# EAGLE board stripPCB (EAGLE 6.2)
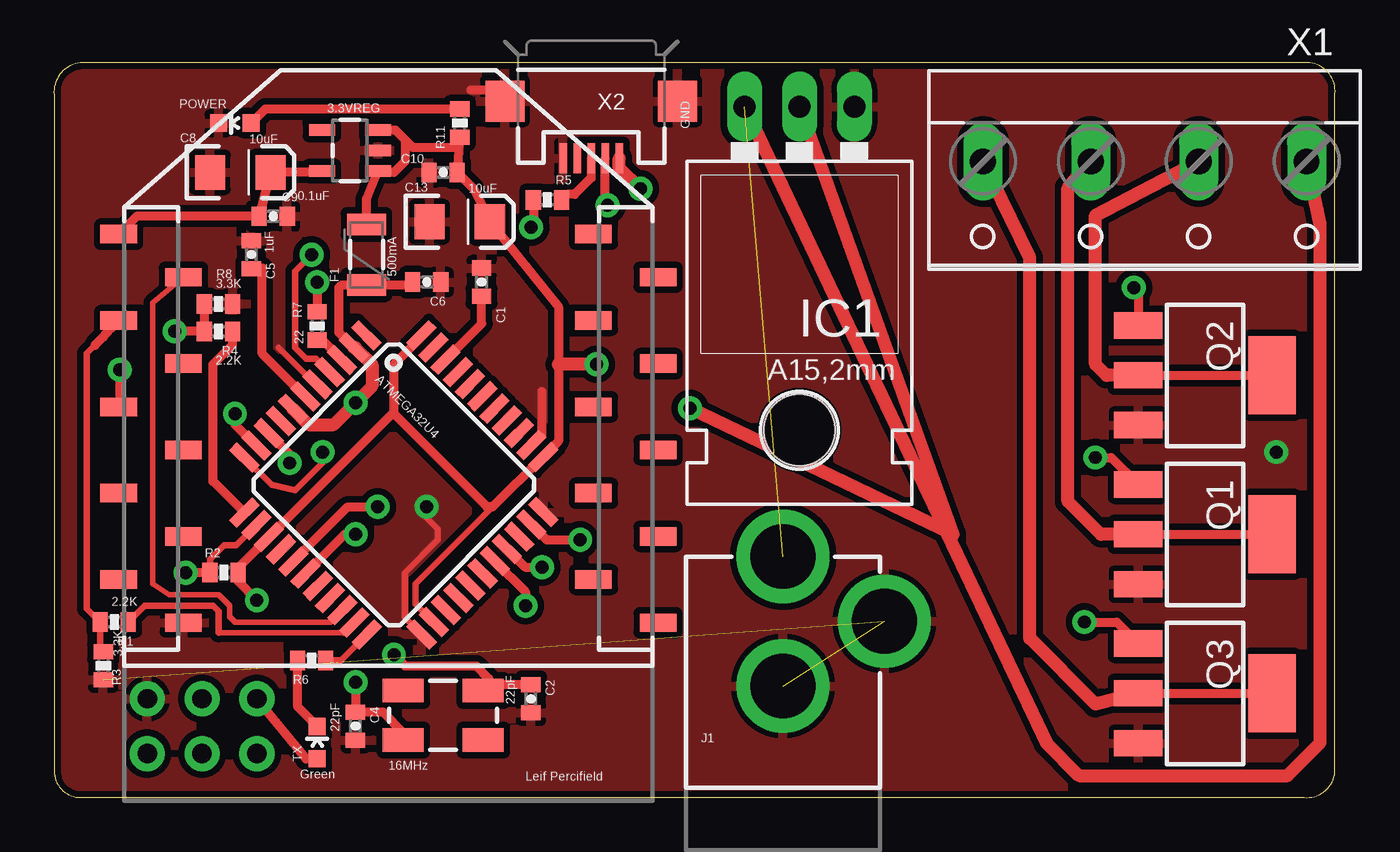
[diagram p0: board, top side]
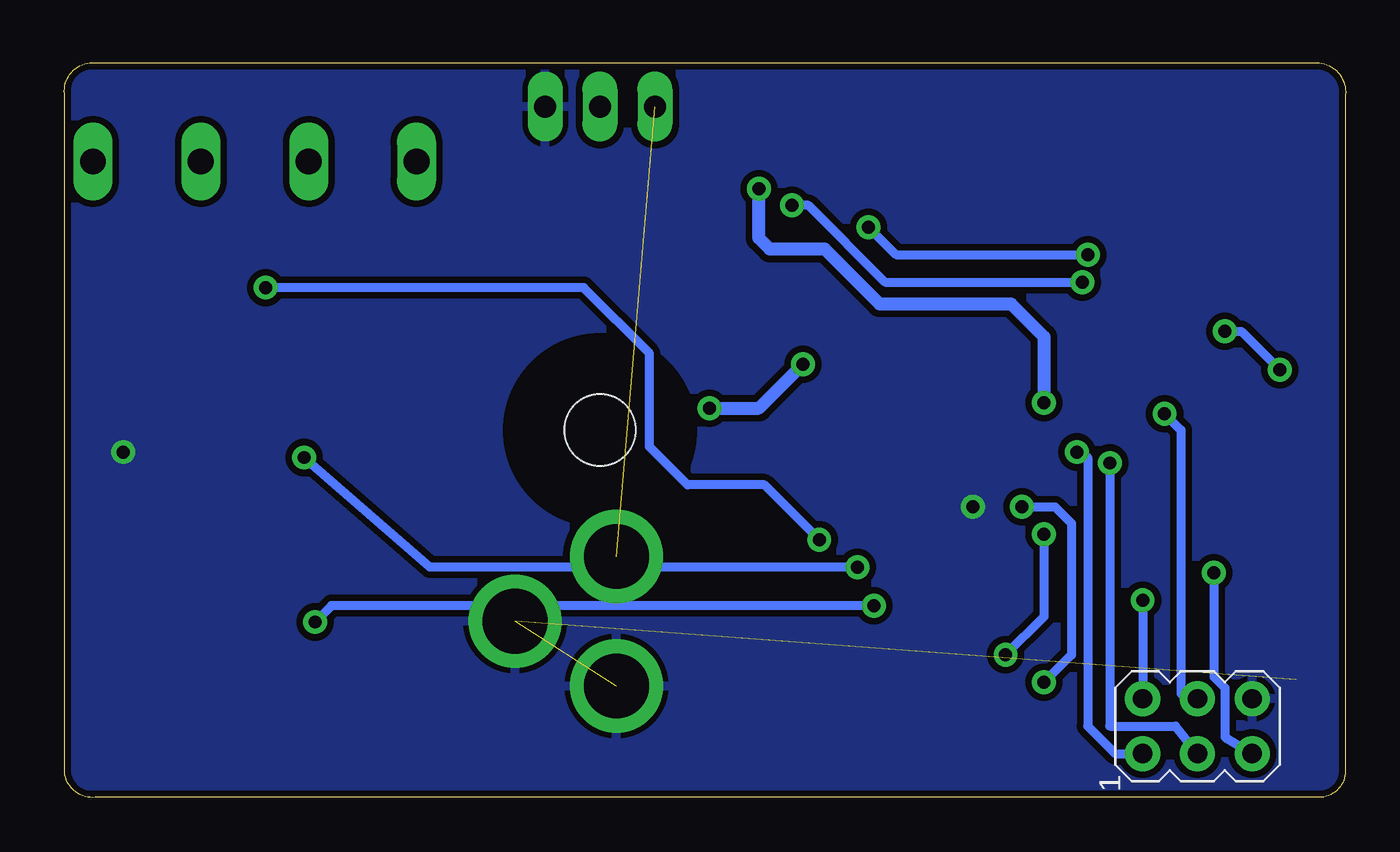
[diagram p1: board, bottom side, seen from below]

Size 59.37 x 34.03 mm. Coordinates in mm from the lower left corner, seen from the top.
Outline: 0.01,1.23 arc90 1.23,0.01 57.94,0.01 arc90 59.37,1.18 59.37,32.61 arc90 58.2,34.03 1.22,34.03 arc90 0.01,32.56 0.01,1.23
Copper layers (1*16): Top 0.035mm / dielectric 1.5mm / Bottom 0.035mm
Design rules: minimum track width 8mil, minimum drill 20mil, track to track 8mil, track to pad 8mil, pad to pad 8mil, via to via 8mil, smd to smd 8mil, copper to edge 10mil, drill to drill 8mil, minimum pad ring 12mil, minimum via ring 10mil, stop-mask expansion 4mil, vias tented up to drill 25mil, thermal gap 10mil
Net classes: 0 default: width 0.003 mm, drill 0.254 mm, clearance 0.152 mm

## Footprints (pad centres in the part's own frame; a part is rotated, then mirrored left to right if it is on the bottom)
SOT23-5 = smd 0.55 x 1.2: 1 -0.95,-1.3; 2 0,-1.3; 3 0.95,-1.3; 4 0.95,1.3; 5 -0.95,1.3
SPARKFUN-DIGITALIC_TQFP44 = smd 1.5 x 0.5: 1 -5.8,4; 2 -5.8,3.2; 3 -5.8,2.4; 4 -5.8,1.6; 5 -5.8,0.8; 6 -5.8,0; 7 -5.8,-0.8; 8 -5.8,-1.6; 9 -5.8,-2.4; 10 -5.8,-3.2; 11 -5.8,-4; 23 5.8,-4; 24 5.8,-3.2; 25 5.8,-2.4; 26 5.8,-1.6; 27 5.8,-0.8; 28 5.8,0; 29 5.8,0.8; 30 5.8,1.6; 31 5.8,2.4; 32 5.8,3.2; 33 5.8,4 | smd 0.5 x 1.5: 12 -4,-5.8; 13 -3.2,-5.8; 14 -2.4,-5.8; 15 -1.6,-5.8; 16 -0.8,-5.8; 17 0,-5.8; 18 0.8,-5.8; 19 1.6,-5.8; 20 2.4,-5.8; 21 3.2,-5.8; 22 4,-5.8; 34 4,5.8; 35 3.2,5.8; 36 2.4,5.8; 37 1.6,5.8; 38 0.8,5.8; 39 0,5.8; 40 -0.8,5.8; 41 -1.6,5.8; 42 -2.4,5.8; 43 -3.2,5.8; 44 -4,5.8
0402-CAP = smd 0.7 x 0.9: 1 -0.65,0; 2 0.65,0
EIA3216 = smd 1.4 x 1.6: A 1.4,0; C -1.4,0
PTC-1206 = smd 1 x 1.8: 1 -1.4,0; 2 1.4,0
TO220L1 = drill 1.016 long: 1 -2.54,-3.81; 2 0,-3.81; 3 2.54,-3.81 | hole 3.302: 0,11.176
AVRISP = drill 0.9 pad 1.626: 1 -1.27,2.54; 2 1.27,2.54; 3 -1.27,0; 4 1.27,0; 5 -1.27,-2.54; 6 1.27,-2.54
POWER_JACK_PTH = drill 2.997 pad 4.318: GND 0,7.7; GNDBREAK 4.7,10.7; PWR 0,13.7
LED-0603 = smd 0.8 x 0.8: A 0,-0.75; C 0,0.75
SOT223 = smd 1.219 x 2.235: 1 -2.311,-3.099; 2 0,-3.099; 3 2.311,-3.099 | smd 3.6 x 2.2: 4 0,3.099
0402-RES = smd 0.7 x 0.9: 1 -0.65,0; 2 0.65,0
XBEE-SMD = smd 1.7 x 0.85: 1 -12.5,20; 2 -9.5,18; 3 -12.5,16; 4 -9.5,14; 5 -12.5,12; 6 -9.5,10; 7 -12.5,8; 8 -9.5,6; 9 -12.5,4; 10 -9.5,2; 11 12.5,2; 12 9.5,4; 13 12.5,6; 14 9.5,8; 15 12.5,10; 16 9.5,12; 17 12.5,14; 18 9.5,16; 19 12.5,18; 20 9.5,20
W237-4 = drill 1.194 long: 1 -7.5,-1.27; 2 -2.5,-1.27; 3 2.5,-1.27; 4 7.5,-1.27
USB-MICROB = smd 0.35 x 1.4: D+ 0,2.65; D- -0.65,2.65; GND 1.3,2.65; ID 0.65,2.65; VBUS -1.3,2.65 | smd 1.8 x 1.9: MT1 -4,0; MT2 4,0
CRYSTAL-SMD-5X3 = smd 1.9 x 1.1: 1 -1.85,-1.15; 2 1.85,-1.15; 3 1.85,1.15; 4 -1.85,1.15

## Placement (x,y rotation side)
3.3VREG  MIC5219 3.3V  [SOT23-5]  13.72,29.98 90 top
ATMEGA32U4  ATMEGA32U4  [SPARKFUN-DIGITALIC_TQFP44]  15.75,14.48 315.1 top
C1  0.1uF  [0402-CAP]  19.82,23.88 270 top
C2  22pF  [0402-CAP]  22.1,4.58 270 top
C4  22pF  [0402-CAP]  13.98,3.31 270 top
C5  1uF  [0402-CAP]  9.15,25.15 270 top
C6  1uF  [0402-CAP]  17.28,23.88 180 top
C8  10uF  [EIA3216]  8.64,28.96 0 top
C9  0.1uF  [0402-CAP]  10.17,26.93 180 top
C10  1uF  [0402-CAP]  18.04,28.96 180 top
C13  10uF  [EIA3216]  18.8,26.68 0 top
F1  500mA  [PTC-1206]  14.48,25.15 90 top
IC1  LD117AV25  [TO220L1]  34.55,28.2 180 top
ISP1  AVRISP-6  [AVRISP]  6.86,3.31 90 bottom
J1  POWER_JACKPTH  [POWER_JACK_PTH]  33.79,-2.53 0 top
POWER  Red  [LED-0603]  8.39,31.25 90 top
Q1  N-HEXFET-2D_SOT232-  [SOT223]  53.35,12.2 270 top
Q2  N-HEXFET-2D_SOT232-  [SOT223]  53.35,19.56 270 top
Q3  N-HEXFET-2D_SOT232-  [SOT223]  53.35,4.83 270 top
R1  2.2K  [0402-RES]  2.8,8.13 180 top
R2  10K  [0402-RES]  7.88,10.42 0 top
R3  3.3K  [0402-RES]  2.29,6.1 90 top
R4  2.2K  [0402-RES]  7.63,21.6 180 top
R5  22  [0402-RES]  22.87,27.69 0 top
R6  330  [0402-RES]  11.94,6.36 180 top
R7  22  [0402-RES]  12.2,21.85 90 top
R8  3.3K  [0402-RES]  7.63,22.87 180 top
R11  1K  [0402-RES]  18.8,31.25 270 top
TX  Green  [LED-0603]  12.2,2.55 0 top
U$1  XBEE-1B3  [XBEE-SMD]  15.5,6.1 0 top
X1  [W237-4]  50.55,28.2 180 top
X2  USB-MICROB  [USB-MICROB]  24.9,32.26 180 top
Y1  16MHz  [CRYSTAL-SMD-5X3]  18.04,3.82 0 top

## Library data of the parts
3.3VREG = SparkFun-PowerIC; PROD_ID: VREG-09872
ATMEGA32U4 = SparkFun-DigitalIC
C1 C2 C4-C6 C8-C10 C13 F1 POWER R1-R8 R11 TX Y1 = SparkFun
IC1 = v-reg
ISP1 = adafruit
J1 = SparkFun-Connectors
Q1-Q3 = transistor-power
U$1 = SparkFun-RF; PROD_ID: CONN-09042
X1 = con-wago-500; OC_FARNELL: unknown; OC_NEWARK: unknown
X2 = SparkFun-Connectors; PROD_ID: CONN-09505

## Nets
12V: IC1.3 J1.PWR X1.1
+3V3_OUT: 3.3VREG.5 C8.A C9.2 U$1.1
A0: ATMEGA32U4.36
A1: ATMEGA32U4.37
A2: ATMEGA32U4.38
A3: ATMEGA32U4.39
A4: ATMEGA32U4.40
A5: ATMEGA32U4.41
AREF: ATMEGA32U4.42 C1.2
BLUE: Q3.2 Q3.4 X1.4
D2: ATMEGA32U4.19
D3: ATMEGA32U4.18
D4: ATMEGA32U4.25
D5: ATMEGA32U4.31
D6: ATMEGA32U4.27
D7: ATMEGA32U4.1
D8: ATMEGA32U4.28
D9: ATMEGA32U4.29 Q3.1
D10: ATMEGA32U4.30 Q1.1
D11: ATMEGA32U4.12 R4.1
D12: ATMEGA32U4.26
D13: ATMEGA32U4.32 Q2.1
D17: ATMEGA32U4.8
D+: ATMEGA32U4.4 R5.1
D-: ATMEGA32U4.3 R7.1
GND [vcc]: 3.3VREG.2 ATMEGA32U4.5 ATMEGA32U4.15 ATMEGA32U4.23 ATMEGA32U4.33 ATMEGA32U4.35 ATMEGA32U4.43 C1.1 C2.2 C4.2 C5.1 C6.1 C8.C C9.1 C10.2 C13.C IC1.1 ISP1.6 J1.GND J1.GNDBREAK POWER.C Q1.3 Q2.3 Q3.3 R3.1 R8.1 U$1.10 X2.GND X2.MT1 X2.MT2
GREEN: Q2.2 Q2.4 X1.2
MISO: ATMEGA32U4.11 ISP1.1
MOSI: ATMEGA32U4.10 ISP1.4
N$1: ATMEGA32U4.16 C4.1 Y1.1
N$2: ATMEGA32U4.17 C2.1 Y1.3
N$4: ATMEGA32U4.6 C5.2
N$6: R7.2 X2.D-
N$7: R6.2 TX.C
N$8: R5.2 X2.D+
N$38: POWER.A R11.1
RED: Q1.2 Q1.4 X1.3
RESET: ATMEGA32U4.13 ISP1.5 R2.1
SCK: ATMEGA32U4.9 ISP1.3
TX: ATMEGA32U4.21 R1.1
TXLED: ATMEGA32U4.22 R6.1
UVCC: ATMEGA32U4.2 ATMEGA32U4.7 C6.2 F1.1 X2.VBUS
VCC: 3.3VREG.1 3.3VREG.3 ATMEGA32U4.14 ATMEGA32U4.24 ATMEGA32U4.34 ATMEGA32U4.44 C10.1 C13.A F1.2 IC1.2 ISP1.2 R2.2 R11.2 TX.A
WIFIDIN: R1.2 R3.2 U$1.3
WIFIDOUT: ATMEGA32U4.20 U$1.2
WIFIRESET: R4.2 R8.2 U$1.5

## Tracks (layer width: path | path; a pad name or v marks a point on that pad's centre or on a via)
12V  (1 unrouted)
  Top 0.61: IC1.3 45.98,2.55 47.5,1.02 57.16,1.02 58.68,2.55 58.68,26.56 X1.1
+3V3_OUT
  Top 0.406: 3.3VREG.5 12.36,28.96 C8.A 10.02,28.94 C9.2 3.83,26.93 U$1.1
AREF
  Top 0.406: ATMEGA32U4.42 19.82,21.96 C1.2
BLUE
  Top 0.406: Q3.2 Q3.4
  Top 0.61: Q3.2 48.27,4.32 45.22,7.37 45.22,25.02 X1.4
D2
  Top 0.406: ATMEGA32U4.19
D9  (via drill 0.6)
  Top 0.406: ATMEGA32U4.29 21.85,9.53 v21.85,8.9 | v47.76,8.13 49.26,8.13 Q3.1
  Bottom 0.406: v21.85,8.9 47,8.9 v47.76,8.13
D10  (via drill 0.6)
  Top 0.406: ATMEGA32U4.30 21.84,10.67 v22.61,10.67 | v48.27,15.75 49,15.75 Q1.1
  Bottom 0.406: v22.61,10.67 42.42,10.67 v48.27,15.75
D11
  Top 0.406: ATMEGA32U4.12 7.37,14.65 7.37,20.07 8.28,20.98 R4.1
D13  (via drill 0.6)
  Top 0.406: ATMEGA32U4.32 22.83,11.94 v24.39,11.94 | v50.04,23.63 50.25,23.43 Q2.1
  Bottom 0.406: v24.39,11.94 26.93,14.48 30.49,14.48 32.26,16.26 32.26,20.58 35.31,23.63 v50.04,23.63
D+  (via drill 0.6)
  Top 0.305: v11.94,25.15 11.18,24.39 11.18,20.83 11.69,20.33 12.16,20.33 ATMEGA32U4.4
  Top 0.406: R5.1 22.22,26.53 v22.1,26.42
  Bottom 0.406: v22.1,26.42 20.83,25.15 v11.94,25.15
D-
  Top 0.406: R7.1 12.42,21.2 ATMEGA32U4.3
GND  (via drill 0.6)  (2 unrouted)
  Top 0.305: ATMEGA32U4.23 16.26,8.33 16.26,10.42 17.79,11.94 17.79,12.45 17.28,12.96 v17.28,13.47 | ATMEGA32U4.5 12.11,19.15 10.42,20.83
  Top 0.406: X2.MT2 20.39,32.77 19.31,32.77 | ATMEGA32U4.35 22.61,16.83 22.61,18.8
  other vias: 56.65,16.01
  pour Top (isolate 0.305): 0.01,34.04 59.7,34.04 59.7,-0.25 0.01,0.01
  pour Bottom (isolate 0.305): 0.01,34.04 59.44,34.04 59.44,-0.25 0.01,0.01
GREEN
  Top 0.406: Q2.2 Q2.4
  Top 0.61: Q2.2 48.77,19.56 48.27,20.07 48.27,26.97 X1.2
MISO  (via drill 0.6)
  Top 0.305: ATMEGA32U4.11 10.08,14.48 11.18,14.23 12.45,15.5 v12.45,16.01
  Bottom 0.406: v12.45,16.01 11.94,15.75 11.94,3.31 10.67,2.04 ISP1.1
MOSI  (via drill 0.6)
  Top 0.406: ATMEGA32U4.10 9.35,16.31 8.39,17.28 v8.39,17.79
  Bottom 0.406: v8.39,17.79 7.63,17.02 7.63,4.83 ISP1.4
N$1  (via drill 0.6)
  Top 0.406: Y1.1 16.19,3.01 15.25,3.96 C4.1 v13.98,5.34 | ATMEGA32U4.16 13.62,13.47 v14.99,13.47
  Bottom 0.406: v14.99,13.47 13.47,13.47 12.71,12.71 12.71,6.61 v13.98,5.34
N$2  (via drill 0.6)
  Top 0.406: C2.1 20.15,5.23 | 20.15,5.23 Y1.3 | ATMEGA32U4.17 13.47,12.2 v13.98,12.2 | v15.75,6.61 16.26,6.1 19.56,6.1 20.15,5.51 20.15,5.23
  Bottom 0.406: v13.98,12.2 13.98,8.39 v15.75,6.61
N$4
  Top 0.406: ATMEGA32U4.6 9.66,20.57 9.66,24.5 C5.2 9.66,24.53
N$6  (via drill 0.6)
  Top 0.406: v12.2,23.88 R7.2 | v25.66,27.44 25.55,27.55 X2.D-
  Bottom 0.406: v12.2,23.88 21.34,23.88 24.9,27.44 v25.66,27.44
N$7
  Top 0.406: TX.C 11.29,4.2 R6.2
N$8
  Top 0.406: X2.D+ 24.9,28.71 24.14,27.95 23.77,27.95 R5.2
N$38
  Top 0.406: R11.1 9.79,31.9 POWER.A
RED
  Top 0.406: Q1.2 Q1.4
  Top 0.61: Q1.2 48.52,12.2 47,13.72 47,28.24 X1.3
RESET  (via drill 0.6)
  Top 0.305: 7.23,10.47 7.23,11.04 7.88,11.69 8.45,11.69 ATMEGA32U4.13
  Top 0.406: 7.23,10.47 R2.1 v6.1,10.42
  Bottom 0.406: v6.1,10.42 6.1,5.59 5.59,5.09 5.59,2.8 ISP1.5
SCK  (via drill 0.6)
  Top 0.406: ATMEGA32U4.9 10.93,15.9 v10.93,15.5
  Bottom 0.406: v10.93,15.5 10.93,3.31 7.88,3.31 ISP1.3
TX
  Top 0.254: 13.44,7.63 7.63,7.63
  Top 0.305: ATMEGA32U4.21 13.44,7.63 | 7.63,7.63 7.63,8.64 7.37,8.9 4.21,8.9 R1.1
TXLED
  Top 0.305: R6.1 13.3,6.36 ATMEGA32U4.22
UVCC  (via drill 0.6)
  Top 0.406: ATMEGA32U4.2 13.21,21.54 13.21,23.63 13.34,23.75 F1.1 16.5,23.75 C6.2
  Top 0.61: ATMEGA32U4.7 11.81,17.28 12.96,17.28 v13.98,18.29 14.74,19.06 14.74,20.07 13.96,20.85 ATMEGA32U4.2 | v27.18,28.2 26.2,29.19 X2.VBUS
  Bottom 0.61: v13.98,18.29 13.98,21.34 15.5,22.87 21.6,22.87 24.14,25.41 26.68,25.41 27.18,25.91 v27.18,28.2
VCC  (via drill 0.6)
  Top 0.254: 23.37,22.87 23.37,22.74
  Top 0.305: ATMEGA32U4.24 16.77,8.96 16.77,9.91 20.33,13.47 | 22.61,15.75 ATMEGA32U4.34
  Top 0.406: 15.71,17.83 ATMEGA32U4.14 8.53,10.64 R2.2 8.53,10.02 v9.4,9.15 | 15.71,17.83 15.75,17.86 15.75,20.07 17.01,21.33 ATMEGA32U4.44 | 22.63,15.77 22.61,15.75 20.33,13.47 20.07,13.47 15.75,17.79 | ATMEGA32U4.34 22.68,15.82 23.37,16.52 23.37,20.07 23.37,22.74 C13.A 19.44,28.21 C10.1 R11.2 18.54,30.11 16.64,30.11 16.26,30.49 | F1.2 14.48,27.73 3.3VREG.1 15.09,28.96 15.75,28.96 16.26,29.47 16.26,30.49 | 3.3VREG.3 15.82,30.93 16.26,30.49 | 15.75,17.79 | 15.75,17.79 15.71,17.83 | TX.A 11.68,1.8 ISP1.2
  Top 0.61: IC1.2 41.66,12.2 v29.47,18.04 | v25.15,20.07 23.37,20.07
  Bottom 0.406: v9.4,9.15 ISP1.2
  Bottom 0.61: v29.47,18.04 27.18,18.04 v25.15,20.07
WIFIDIN
  Top 0.305: R3.2 2.15,6.89 R1.2 1.53,8.75 1.53,20.58 2.65,21.7 2.65,21.75
  Top 0.406: U$1.3 2.65,21.75 2.49,21.6 2.29,21.34 1.9,20.95
WIFIDOUT
  Top 0.254: ATMEGA32U4.20 12.81,8.13 8.39,8.13 8.13,8.39 8.13,8.9 7.63,9.4 5.34,9.4 4.58,9.91 4.58,22.93 U$1.2
WIFIRESET  (via drill 0.6)
  Top 0.406: R8.2 R4.2 v5.59,21.6 | v3.05,19.82 3.05,18.16 U$1.5
  Bottom 0.406: v5.59,21.6 4.83,21.6 v3.05,19.82

## Text on the board
tPlace: GND | Leif Percifield